# Altium PCB PCB_Fusion.PcbDoc
Units mm, origin at the board's own origin, x right, y up, seen from the top; angles counter-clockwise.
Board outline 25.02 x 45.09 mm, 2 copper layers (Top Layer, Bottom Layer); 50 components, 37 nets, 188 pads, 56 vias.
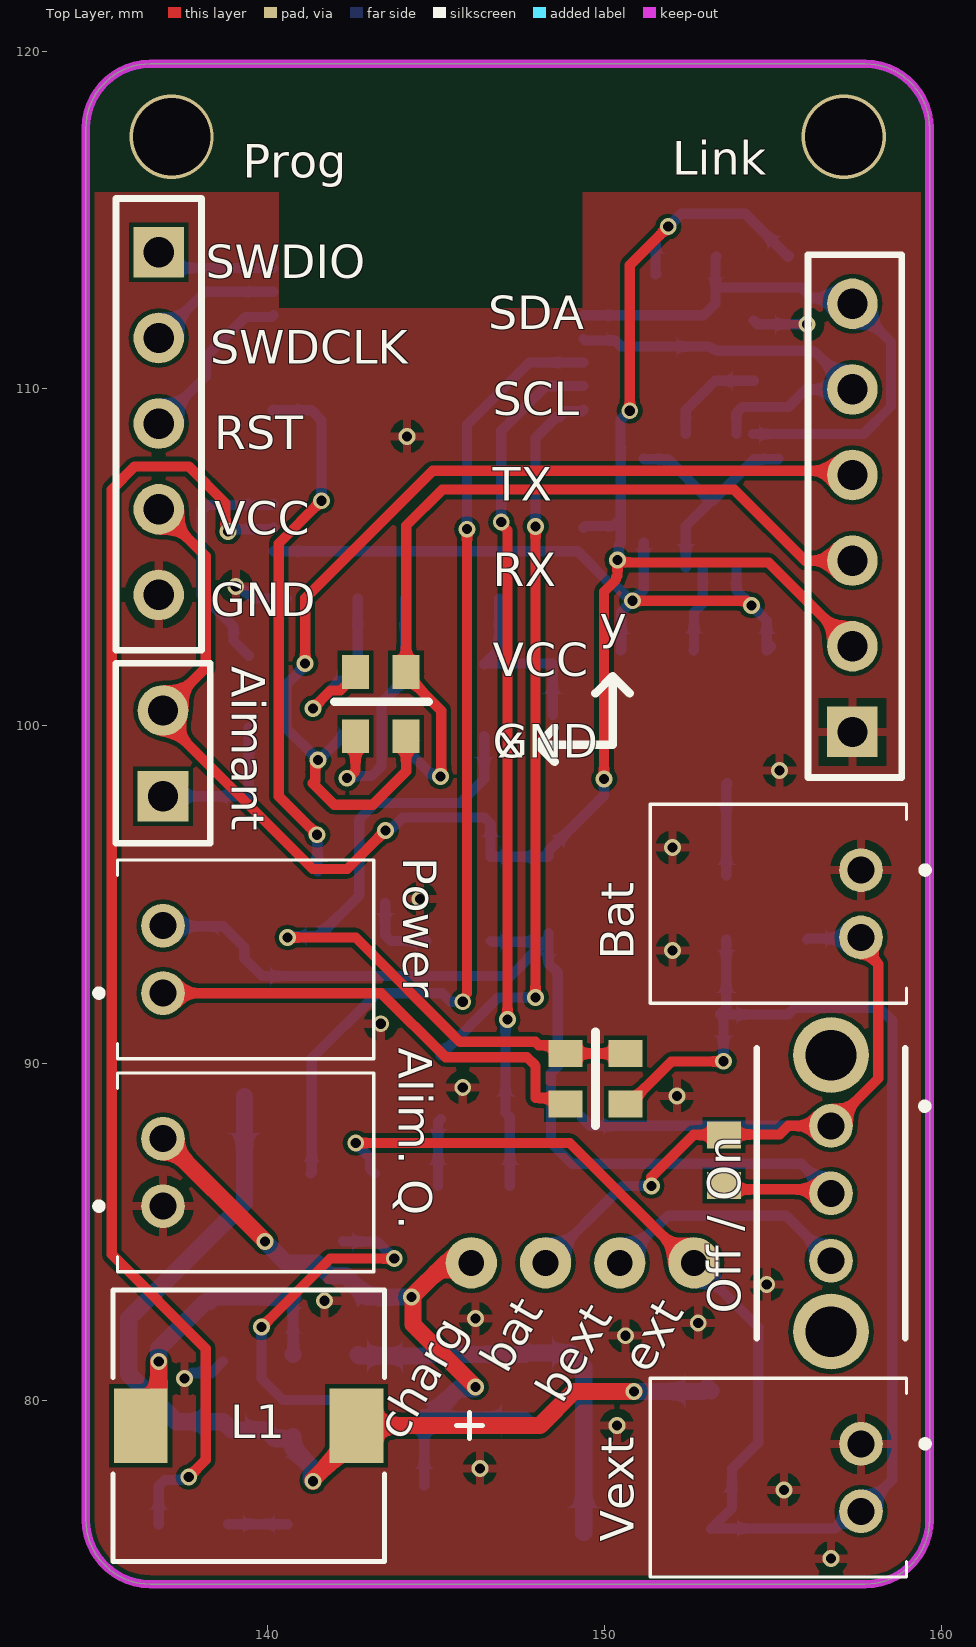
[diagram p0: Top Layer view]
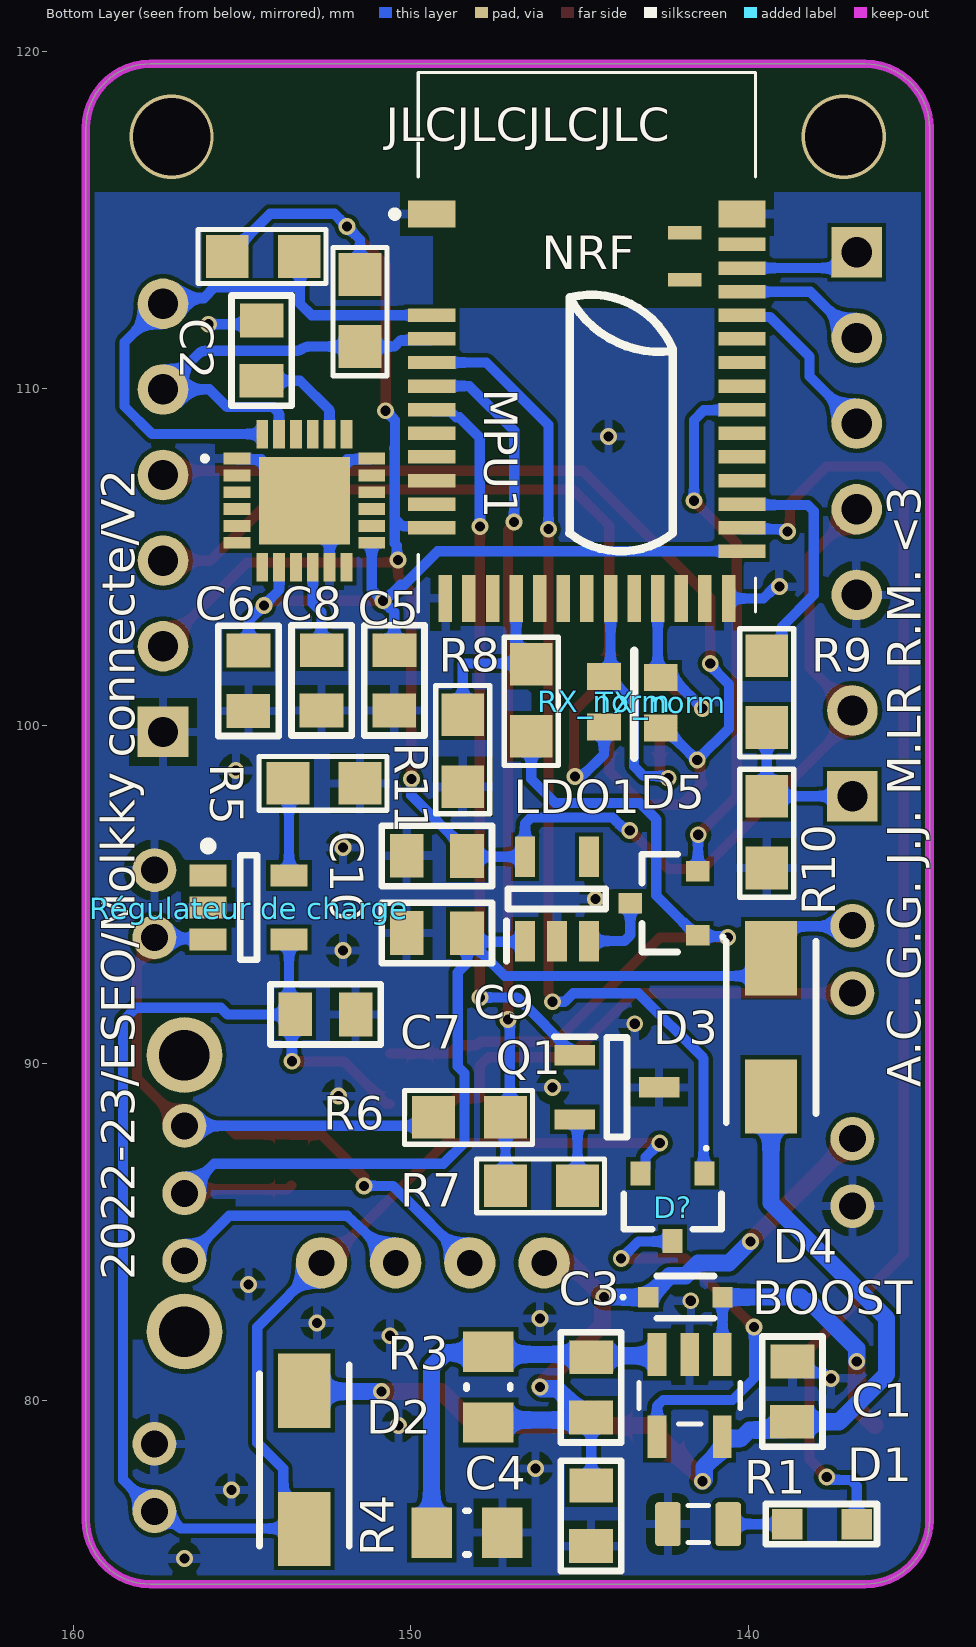
[diagram p1: Bottom Layer view, seen from below]
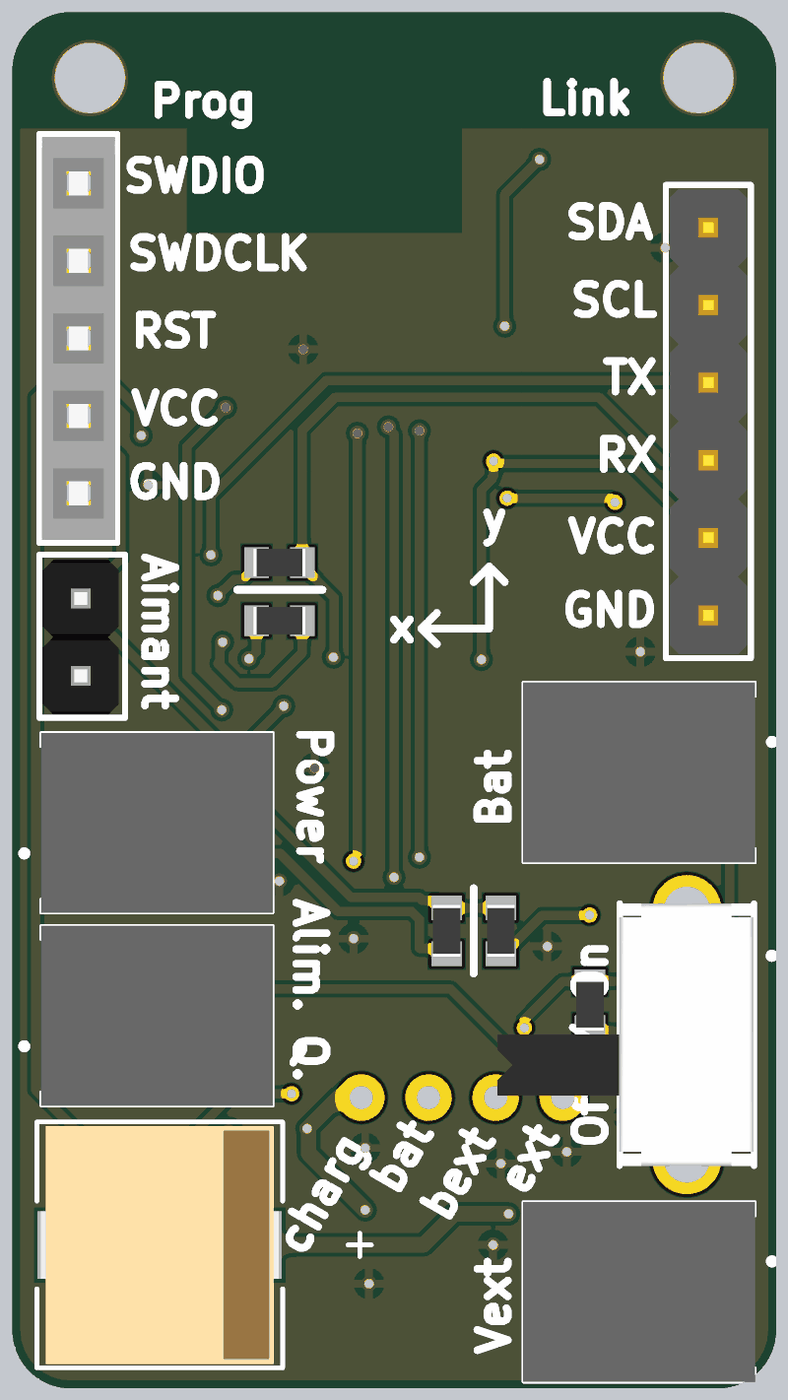
[diagram p2: 3D render of the assembled board from above, using the file's embedded part models]
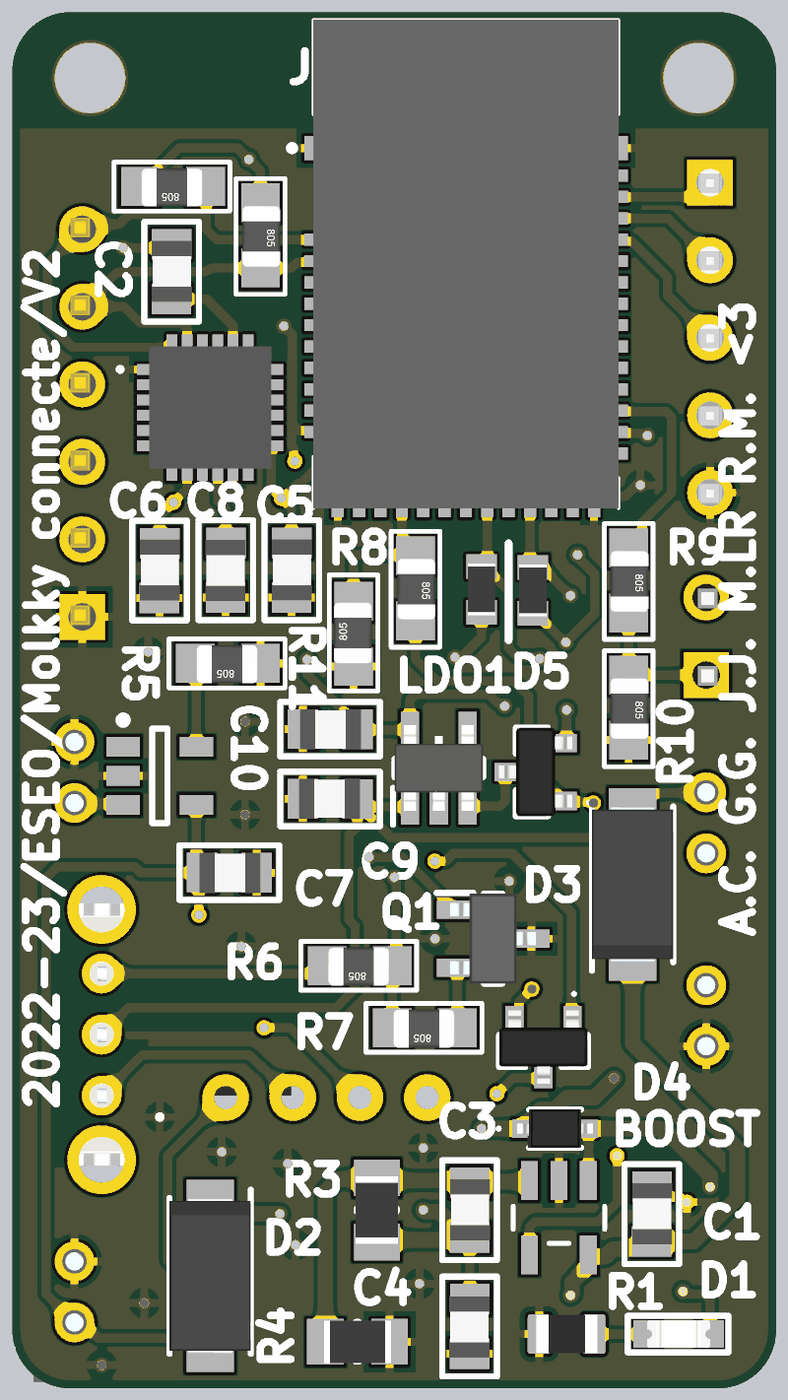
[diagram p3: 3D render of the assembled board from below, using the file's embedded part models]

## Layer stack, top to bottom
Top Solder: solder mask 0.0102, Solder Resist, Dk 3.5
Top Layer: signal copper 0.0356
Dielectric 1: dielectric 0.32, FR-4, Dk 4.8
Bottom Layer: signal copper 0.0356
Bottom Solder: solder mask 0.0102, Solder Resist, Dk 3.5

## Board outline
134.62,76.454 134.62,117.729 cw(c136.525,117.729) 136.525,119.634 157.734,119.634 cw(c157.734,117.729) 159.639,117.729 159.639,76.454 cw(c157.734,76.454) 157.734,74.549 136.525,74.549 cw(c136.525,76.454)

## Design rules (kind name [scope] priority, off if disabled: settings)
Clearance [All] p1: gap=0.127 ignorepadtopadclearanceinfootprint=FALSE except(0.254: Arc-Via Track-Via Via-Via; 0.508: THPad-THPad)
PolygonConnect [All] p1: connectstyle=Relief reliefconductorwidth=0.254 reliefentries=4 polygonreliefangle="90 Angle" airgapwidth=0.254
RoutingVias [All] p1: holewidth=0.3 width=0.5 viastyle="Through Hole" minholewidth=0.762 minwidth=0.381 maxholewidth=1.016 maxwidth=0.762
SMDNeckDown [All] p1: percent=50.000
SolderMaskExpansion [All] p1: expansion=0.102 istentingtop=FALSE
Width [All] p1: maxlimit=0.508 minlimit=0.127 preferedwidth=0.305
30 further rules are at their usual default settings.

## Classes and differential pairs
component class Fusion: BOOST C1 C2 C3 C4 C5 C6 C7 C8 C9 C10 D1 D2 D3 D4 D5 L1 LDO1 Link MPU1 NRF Prog Q1 R1 R3 R4 R5 R6 R7 R8 R9 R10 R11

## Components (designator, comment, footprint, x,y, rotation, side; value= is the part's Value field where it differs from the comment)
Aimant "JUMPER2" BARRETTE_2_M_D 136.906,97.917 r90 top (schematic designator "Switch magnetique1")
"Alim. Q." "S2B-PH-K-S" S2BPHKS 136.906,85.757 r270 top (schematic designator Connecteur_Alim_Quille1)
Bat "S2B-PH-K-S" S2BPHKS 157.607,95.726 r90 top (schematic designator "Connecteur Bat")
BOOST "LM2735XMF" SOT95P285X110-5N 141.732,80.137 r270 bottom
C1 "CONDENSATEUR_CMS_CER_0805" CONDENSATEUR_CMS_0805 138.694,79.363 r90 bottom value=10uF
C2 "CONDENSATEUR_CMS_CER_0805" CONDENSATEUR_CMS_0805 154.432,110.236 r90 bottom value=2.2nF
C3 "CONDENSATEUR_CMS_CER_0805" CONDENSATEUR_CMS_0805 144.663,79.49 r90 bottom value=330pF
C4 "CONDENSATEUR_CMS_CER_0805" CONDENSATEUR_CMS_0805 144.653,77.47 r270 bottom value=10uF
C5 "CONDENSATEUR_CMS_CER_0805" CONDENSATEUR_CMS_0805 150.495,100.457 r90 bottom value=100nF
C6 "CONDENSATEUR_CMS_CER_0805" CONDENSATEUR_CMS_0805 154.823,100.445 r90 bottom value=10nF
C7 "CONDENSATEUR_CMS_CER_0805" CONDENSATEUR_CMS_0805 153.428,91.45 r180 bottom value=4.7uF
C8 "CONDENSATEUR_CMS_CER_0805" CONDENSATEUR_CMS_0805 152.644,102.247 r270 bottom value=100nF
C9 "CONDENSATEUR_CMS_CER_0805" CONDENSATEUR_CMS_0805 148.336,93.853 r0 bottom value=1uF
C10 "CONDENSATEUR_CMS_CER_0805" CONDENSATEUR_CMS_0805 150.126,96.149 r180 bottom value=4.7uF
D1 "LED_CMS_0805" LED_CMS_0805 136.779,76.327 r270 bottom
D2 "ES1D-E3_61T" DIOM5127X229N 153.162,78.232 r270 bottom
D3 "ES1D-E3_61T" DIOM5127X229N 139.319,91.059 r90 bottom
D4 "BAT165AX" BAT165AX 141.859,83.058 r180 bottom
D5 "BAT54C,215" BAT54C215 142.494,94.742 r90 bottom
D? "BAT54C,215" BAT54C215 142.24,85.725 r0 bottom
L1 "1234659" IND_123_4659_RSP 139.446,79.248 r180 top
LDO1 "TPS76333DBVT" SOT95P280X145-5N 145.669,94.869 r90 bottom
Link "BARRETTE_6 CONTACTS_1 RANGEE_MALE_DROITE" BARRETTE_6_M_D 157.353,99.822 r90 top (schematic designator "Connecteur link")
MPU1 "MPU-6050" MPU6050 153.162,106.68 r180 bottom
NRF "MDBT42Q-512KV2" MDBT42Q512KV2 144.78,111.379 r180 bottom
"Off / On" "OS102011MA1QN1" OS102011MA1QN1 156.718,86.138 r270 top (schematic designator "Interrupteur glissière?")
Power "S2B-PH-K-S" S2BPHKS 136.906,92.075 r270 top (schematic designator "Interrupteur Power")
"Power btn" "Resistor 4k7 +/-1% 0603 100 mW" RESC1608X55X25ML10T15 148.844,89.535 r90 top value=0
"Power Vext" "Resistor 4k7 +/-1% 0603 100 mW" RESC1608X55X25ML10T15 150.622,89.535 r90 top value=0
Prog "BARRETTE_5 CONTACTS_1 RANGEE_FEMELLE_DROITE" BARRETTE_5_F_D 136.779,114.046 r270 top (schematic designator "Connecteur prog1")
"PULLUP SCL1" "RESISTANCE_CMS_0805" RESISTANCE_CMS_0805 151.511,113.386 r270 bottom value=10k
"PULLUP SDA1" "RESISTANCE_CMS_0805" RESISTANCE_CMS_0805 153.314,113.919 r0 bottom value=10k
Q1 "TSM2312CX_RFG" SOT95P280X130-3N 143.891,89.281 r180 bottom
R1 "Resistor 1K +/-5% 0805 125 mW" RESC0805(2012)_L 141.478,76.327 r180 bottom value=150
R2 "Resistor 4k7 +/-1% 0603 100 mW" RESC1608X55X25ML10T15 153.543,87.122 r270 top value=0
R3 "Resistor 10k +/-1% 0805 125 mW" RESC2013X50X35ML15T15 147.701,80.391 r270 bottom value=33k
R4 "Resistor 10k +/-1% 0805 125 mW" RESC2013X50X35ML15T15 148.336,76.073 r0 bottom value=100k
R5 "RESISTANCE_CMS_0805" RESISTANCE_CMS_0805 151.511,98.298 r0 bottom value=10k
R6 "RESISTANCE_CMS_0805" RESISTANCE_CMS_0805 147.193,88.392 r0 bottom value=100k
R7 "RESISTANCE_CMS_0805" RESISTANCE_CMS_0805 145.059,86.36 r0 bottom value=100k
R8 "RESISTANCE_CMS_0805" RESISTANCE_CMS_0805 146.431,101.829 r270 bottom value=100k
R9 "RESISTANCE_CMS_0805" RESISTANCE_CMS_0805 139.446,102.083 r270 bottom value=100
R10 "RESISTANCE_CMS_0805" RESISTANCE_CMS_0805 139.446,97.917 r270 bottom value=10k
R11 "RESISTANCE_CMS_0805" RESISTANCE_CMS_0805 148.463,98.196 r90 bottom value=100k
RX_inv "Resistor 4k7 +/-1% 0603 100 mW" RESC1608X55X25ML10T15 143.367,99.695 r0 top value=0
RX_norm "Resistor 4k7 +/-1% 0603 100 mW" RESC1608X55X25ML10T15 144.272,100.723 r90 bottom value=0
"Régulateur de charge" "MCP73831T-2DCI/OT" SOT-23-OT5_N 154.813,94.615 r180 bottom
TX_inv "Resistor 4k7 +/-1% 0603 100 mW" RESC1608X55X25ML10T15 143.367,101.6 r0 top value=0
TX_norm "Resistor 4k7 +/-1% 0603 100 mW" RESC1608X55X25ML10T15 142.587,100.689 r90 bottom value=0
Vext "S2B-PH-K-S" S2BPHKS 157.607,78.708 r90 top (schematic designator "Connecteur Vext")

## Footprints (in the part's own frame and the unit in brackets; to place one, negate y for a bottom-side part, rotate by r counter-clockwise, add the part's x,y. Pads: shape width x height; smd on the part's side, far side on the other; paste and mask are expansions set on the pad)
BARRETTE_2_M_D [mm] "BARRETTE 2 CONTACTS ; 1 RANGEE ; DROITE ; MALE ; ESPACEMENT BROCHES = 2.54 mm"
  rect 1.5x1.5 hole 0.9: 1(0,0)
  round 1.5 hole 0.9: 2(2.54,0)
  silkscreen extent -1.4,-1.4 3.94,1.4, body extent -1.3,-1.2 3.78,1.3, height 8.55
BARRETTE_5_F_D [mm] "BARRETTE 5 CONTACTS ; 1 RANGEE ; DROITE ; FEMELLE ; ESPACEMENT BROCHES = 2.54 mm"
  rect 1.5x1.5 hole 0.9: 1(0,0)
  round 1.5 hole 0.9: 2(2.54,0) 3(5.08,0) 4(7.62,0) 5(10.16,0)
  silkscreen extent -1.6,-1.27 11.8,1.27, body extent -1.5,-1.2 11.7,1.21, height 8.5
BARRETTE_6_M_D [mm] "BARRETTE 6 CONTACTS ; 1 RANGEE ; DROITE ; MALE ; ESPACEMENT BROCHES = 2.54 mm"
  rect 1.5x1.5 hole 0.9: 1(0,0)
  round 1.5 hole 0.9: 2(2.54,0) 3(5.08,0) 4(7.62,0) 5(10.16,0) 6(12.7,0)
  silkscreen extent -1.35,-1.46 14.15,1.32, body extent -1.22,-1.34 14.02,1.2, height 10.1
BAT54C215 [mm]
  rect 0.6x0.7 smd: 1(-0.95,-1) 2(0.95,-1) 3(0,1)
  silkscreen extent -1.45,-1.8 1.45,0.65, body extent -1.45,-1.2 1.45,1.2, height 0.95
BAT165AX [mm]
  rect 0.6x0.6 smd: 1(-1.1,0) 2(1.1,0)
  silkscreen extent -1.9,-0.62 0.85,0.62, body extent -1.24,-0.62 1.24,0.63, height 0.93
CONDENSATEUR_CMS_0805 [mm] "CONDENSATEUR CMS 0805 ; DIMENSIONS : 2mm x 1.25mm"
  rect 1x1.3 smd: 1(0,0) 2(1.79,-0.01)
  silkscreen extent -0.74,-0.9 2.53,0.89, body extent -0.09,-0.67 1.91,0.64, height 0.73
DIOM5127X229N [mm]
  rect 2.2x1.55 smd: 1(-2.05,0) 2(2.05,0)
  silkscreen extent -2.82,-1.33 2.55,1.33, body extent -2.55,-1.33 2.55,1.33, height 2.29
IND_123_4659_RSP [mil]
  rect 63x87 smd paste+0 mask+0: 1(-126,0) 2(126,0)
  silkscreen extent -273,-159 159,159, body extent -154,-154 154,154, height 199
LED_CMS_0805 [mm] "LED CMS 0805 ; DIMENSIONS : 2.0mm x 0.9mm"
  rect 0.9x0.9 smd: 1(0,0) 2(0,-2.062)
  silkscreen extent -0.6,-2.7 0.6,0.6, body extent -0.45,-2.06 0.45,0, height 0.85
MDBT42Q512KV2 [mm]
  rect 1.4x0.8 smd: 1(-4.6,3.8) 39(4.6,3.8)
  rect 1.4x0.4 smd: 2(-4.6,0.8) 3(-4.6,0.1) 4(-4.6,-0.6) 5(-4.6,-1.3) 6(-4.6,-2) 7(-4.6,-2.7) 8(-4.6,-3.4) 9(-4.6,-4.1) 10(-4.6,-4.8) 11(-4.6,-5.5) 25(4.6,-6.2) 26(4.6,-5.5) 27(4.6,-4.8) 28(4.6,-4.1) 29(4.6,-3.4) 30(4.6,-2.7) 31(4.6,-2) 32(4.6,-1.3) 33(4.6,-0.6) 34(4.6,0.1) 35(4.6,0.8) 36(4.6,1.5) 37(4.6,2.2) 38(4.6,2.9)
  rect 0.4x1.4 smd: 12(-4.2,-7.6) 13(-3.5,-7.6) 14(-2.8,-7.6) 15(-2.1,-7.6) 16(-1.4,-7.6) 17(-0.7,-7.6) 18(0,-7.6) 19(0.7,-7.6) 20(1.4,-7.6) 21(2.1,-7.6) 22(2.8,-7.6) 23(3.5,-7.6) 24(4.2,-7.6)
  rect 1x0.4 smd: 40(2.9,3.25) 41(2.9,1.85)
  silkscreen extent -5.8,-8 5,8, body extent -5,-8 5,8, height 2.3
MPU6050 [mm]
  rect 0.8x0.35 smd: 1(-2,1.25) 2(-2,0.75) 3(-2,0.25) 4(-2,-0.25) 5(-2,-0.75) 6(-2,-1.25) 13(2,-1.25) 14(2,-0.75) 15(2,-0.25) 16(2,0.25) 17(2,0.75) 18(2,1.25)
  rect 0.35x0.85 smd: 7(-1.25,-1.975) 8(-0.75,-1.975) 9(-0.25,-1.975) 10(0.25,-1.975) 11(0.75,-1.975) 12(1.25,-1.975) 19(1.25,1.975) 20(0.75,1.975) 21(0.25,1.975) 22(-0.25,1.975) 23(-0.75,1.975) 24(-1.25,1.975)
  rect 2.7x2.6 smd: 25(0,0)
  silkscreen extent -3,1.2 -2.9,1.3, body extent -2,-2 2,2, height 0.88
OS102011MA1QN1 [mm]
  round 1.3 hole 0.8: 1(-2,0) 2(0,0) 3(2,0)
  round 2.25 hole 1.5: 4(-4.1,0) 5(4.1,0)
  silkscreen extent -4.3,-2.2 4.3,2.88, body extent -4.3,-6.22 4.3,2.18, height 4.59
RESC0805(2012)_L [mm] "Chip Resistor, Body 2.0x1.3mm, IPC High Density"
  rrect25% 0.76x1.3 smd: 1(-0.9,0) 2(0.89,0)
  silkscreen extent -0.3,-0.55 0.3,0.55, body extent -1,-0.62 1,0.63, height 0.6
RESC1608X55X25ML10T15 [mm] "Chip Resistor, 2-Leads, Body 1.70x0.90mm, IPC Low Density"
  rect 0.8x1 smd: 1(-0.75,0) 2(0.75,0)
  body extent -0.85,-0.45 0.85,0.45, height 0.55
RESC2013X50X35ML15T15 [mm] "Chip Resistor, 2-Leads, Body 2.2x1.4mm, IPC Low Density"
  rect 1.2x1.5 smd: 1(-1.05,0) 2(1.05,0)
  silkscreen extent -0.05,-0.65 0.05,0.65, body extent -1.1,-0.7 1.1,0.7, height 0.5
RESISTANCE_CMS_0805 [mil] "RESISTANCE CMS 0805 ; DIMENSIONS : 2mm x 1.25mm"
  rect 50x50 smd: 1(0,0) 2(84,0)
  silkscreen extent -31,-31 118,31, body extent 4,-24 83,26, height 31
S2BPHKS [mm]
  round 1.3 hole 0.8: 1(0,0) 2(-2,0)
  silkscreen extent -3.95,-2 1.95,6.25, body extent -3.95,-1.35 1.95,6.25, height 4.9
SOT95P280X130-3N [mm]
  rect 1.2x0.6 smd: 1(-1.25,0.95) 2(-1.25,-0.95) 3(1.25,0)
  silkscreen extent -1.85,-1.47 0.3,1.5, body extent -1.4,-1.47 1.4,1.47, height 1.3
SOT95P280X145-5N [mm]
  rect 1.2x0.6 smd: 1(-1.25,0.95) 2(-1.25,0) 3(-1.25,-0.95) 4(1.25,-0.95) 5(1.25,0.95)
  silkscreen extent -1.85,-1.45 0.3,1.5, body extent -1.4,-1.45 1.4,1.45, height 1.2
SOT95P285X110-5N [mil]
  rect 50x22 smd: 1(-48,38) 2(-48,0) 3(-48,-38) 4(48,-38) 5(48,38)
  silkscreen extent -15,-59 33,59
SOT-23-OT5_N [mm] "SOT23, 5-Leads, Body 2.9x1.6mm, Pitch 0.95mm, Lead Span 2.7mm, IPC Medium Density"
  rect 1.1x0.65 smd: 1(-1.2,0.95) 2(-1.2,0) 3(-1.2,-0.95) 4(1.2,-0.95) 5(1.2,0.95)
  silkscreen extent -1.33,-1.55 0.25,1.95, body extent -0.9,-1.55 0.9,1.55, height 1.45

## Part data
Aimant: library part CMP-039-0004-1, "BARRETTE 2 CONTACTS 1 RANGEE MALE DROITE", Design Item ID=JUMPER2, Source=connecteurs.SchLib, Type=JUMPER2
"Alim. Q." Bat Power Vext: "Connector", Manufacturer_Name="JST (JAPAN SOLDERLESS TERMINALS)", Datasheet Link=https://media.digikey.com/pdf/Data%20Sheets/JST%20PDFs/PH%20Series.pdf, Height=4.8mm, Manufacturer_Part_Number=S2B-PH-K-S
BOOST: "Integrated Circuit", Manufacturer_Name="Texas Instruments", Manufacturer_Part_Number=LM2735XMF
C1 C2 C3 C4 C5 C6 C7 C8 C9 C10: library part CMP-038-0003-1, "CONDENSATEUR CMS CERAMIQUE 0805", Design Item ID=CONDENSATEUR_CMS_CER_0805, Source="composants passifs.SchLib", Type=CMS_0805
D1: library part CMP-024-0003-1, "LED CMS 0805", Design Item ID=LED_CMS_0805, Source=affichage.SchLib, Type=CMS_0805
D2 D3: "Diode", Arrow Part Number=ES1D-E3/61T, Manufacturer_Name=Vishay, Mouser Part Number=625-ES1D-E3, Arrow Price/Stock=https://www.arrow.com/en/products/es1d-e361t/vishay, Datasheet Link=https://componentsearchengine.com/Datasheets/2/ES1D-E3_61T.pdf, Height=2.29mm, Manufacturer_Part_Number=ES1D-E3/61T, Mouser Price/Stock=https://www.mouser.co.uk/ProductDetail/Vishay-General-Semiconductor/ES1D-E3-61T?qs=rfh7uIuiIO0XwaKoN5aNdQ%3D%3D
D4: "Schottky Diode", Manufacturer_Name=Nexperia, Mouser Part Number=771-BAT165AX, Arrow Part Number=BAT165AX, Arrow Price/Stock=https://www.arrow.com/en/products/bat165ax/nexperia?region=nac, Datasheet Link=https://assets.nexperia.com/documents/data-sheet/BAT165A.pdf, Height=1.1mm, Manufacturer_Part_Number=BAT165AX, Mouser Price/Stock=https://www.mouser.co.uk/ProductDetail/Nexperia/BAT165AX?qs=1fQ7IOp4WriMQ9TlJoQ5jw%3D%3D
D5 D?: "Schottky Diode", Manufacturer_Name=Nexperia, Mouser Part Number=771-BAT54C-T/R, Arrow Part Number=BAT54C,215, Arrow Price/Stock=https://www.arrow.com/en/products/bat54c215/nexperia?region=nac, Datasheet Link=https://assets.nexperia.com/documents/data-sheet/BAT54_SER.pdf, Height=1.1mm, Manufacturer_Part_Number=BAT54C,215, Mouser Price/Stock=https://www.mouser.co.uk/ProductDetail/Nexperia/BAT54C215?qs=me8TqzrmIYV5SKKt13YKQA%3D%3D
L1: "No Description Available", Mfr_Name="RS Pro", Copyright="Copyright (C) 2022 Ultra Librarian. All rights reserved.", Manufacturer_Part_Number=1234659, RefDes=RefDes, Type=DEV
LDO1: "Integrated Circuit", Manufacturer_Name="Texas Instruments", Mouser Part Number=595-TPS76333DBVT, Arrow Part Number=TPS76333DBVT, Arrow Price/Stock=https://www.arrow.com/en/products/tps76333dbvt/texas-instruments?region=nac, Datasheet Link=https://datasheet.datasheetarchive.com/originals/distributors/Datasheets-36/DSA-717371.pdf, Height=1.45mm, Manufacturer_Part_Number=TPS76333DBVT, Mouser Price/Stock=https://www.mouser.co.uk/ProductDetail/Texas-Instruments/TPS76333DBVT?qs=tJ5HNKWh3OU6kt%2FvF%2F5hDQ%3D%3D
Link: library part CMP-039-0125-1, "BARRETTE 6 CONTACTS 1 RANGEE MALE DROITE", Design Item ID="BARRETTE_6 CONTACTS_1 RANGEE_MALE_DROITE", Source=connecteurs.SchLib, Type=M_D_6
MPU1: "Integrated Circuit", Manufacturer_Name=TDK, Mouser Part Number=410-MPU-6050, Arrow Part Number=MPU-6050, Arrow Price/Stock=https://www.arrow.com/en/products/mpu-6050/invensense?region=nac, Datasheet Link=https://product.tdk.com/system/files/dam/doc/product/sensor/mortion-inertial/imu/data_sheet/mpu-6000-datasheet1.pdf, Height=0.95mm, Manufacturer_Part_Number=MPU-6050, Mouser Price/Stock=https://www.mouser.co.uk/ProductDetail/TDK-InvenSense/MPU-6050?qs=u4fy%2FsgLU9O14B5JgyQFvg%3D%3D
NRF: "Integrated Circuit", Manufacturer_Name=Raytac, Datasheet Link=http://www.raytac.com/download/index.php?index_id=27, Height=2.2mm, Manufacturer_Part_Number=MDBT42Q-512KV2
"Off / On": "Switch", Manufacturer_Name="C & K COMPONENTS", Mouser Part Number=611-OS102011MA1QN1, Arrow Part Number=OS102011MA1QN1, Arrow Price/Stock=https://www.arrow.com/en/products/os102011ma1qn1/ck?region=europe, Datasheet Link=http://www.ckswitches.com/media/1428/os.pdf, Manufacturer_Part_Number=OS102011MA1QN1, Mouser Price/Stock=https://www.mouser.co.uk/ProductDetail/CK/OS102011MA1QN1?qs=WtljUlYws5R6MUgHcLkz4w%3D%3D
"Power btn" "Power Vext" R2 RX_inv RX_norm TX_inv TX_norm: library part CMP-009-00031-5, "Chip Resistor, 4.7 KOhm, +/- 1%, 0.1 W, -55 to 155 degC, 0603 (1608 Metric)", Case/Package=0603, Max Operating Temperature=155°C, Min Operating Temperature=-55°C, Power=100mW, Tolerance=1%, Mounting Technology=SM, Pins=2, RoHS Compliant=True
Prog: library part CMP-039-0118-1, "BARRETTE 5 CONTACTS 1 RANGEE FEMELLE DROITE", Design Item ID="BARRETTE_5 CONTACTS_1 RANGEE_FEMELLE_DROITE", Source=connecteurs.SchLib, Type=F_D_5
"PULLUP SCL1" "PULLUP SDA1" R5 R6 R7 R8 R9 R10 R11: library part CMP-037-0001-1, "RESISTANCE CMS 0805", Design Item ID=RESISTANCE_CMS_0805, Source="composants passifs.SchLib", Type=CMS_0805
Q1: "MOSFET (N-Channel)", Arrow Part Number="TSM2312CX RFG", Manufacturer_Name="Taiwan Semiconductor", Mouser Part Number=821-TSM2312CXRFG, Arrow Price/Stock=https://www.arrow.com/en/products/tsm2312cxrfg/taiwan-semiconductor?region=asia, Datasheet Link=https://datasheet.datasheetarchive.com/originals/distributors/DKDS-20/389616.pdf, Height=1.3mm, Manufacturer_Part_Number="TSM2312CX RFG", Mouser Price/Stock=https://www.mouser.co.uk/ProductDetail/Taiwan-Semiconductor/TSM2312CX-RFG?qs=QEzMiVqgwc0lDLiJAqaF%252Bw%3D%3D
R1: library part CMP-009-00118-3, "Chip Resistor, 1 kOhms, +/-5%, 125 mW, -55 to 155 degC, 0805", Case/Package=0805, Max Operating Temperature=155°C, Min Operating Temperature=-55°C, Power=125mW, Tolerance=5%, Pins=2
R3 R4: library part CMP-009-00018-5, "Chip Resistor, 10 KOhm, +/- 1%, 125 mW, -55 to 155 degC, 0805 (2012 Metric)", Case/Package=0805, Max Operating Temperature=155°C, Min Operating Temperature=-55°C, Power=125mW, Tolerance=1%, Voltage Rating=150V, Mounting Technology=SM, Pins=2, RoHS Compliant=True
"Régulateur de charge": library part CMP-045-0000-1, "Miniature Single-Cell, Fully Integrated Li-Ion, Li-Polymer Charge Management Controller, 4.2V, 5-Pin SOT-23, Industrial Temperature, Tape and Reel", Manufacturer=Microchip, Code_IPC=SOT23-5, ComponentLink1Description="Manufacturer URL", ComponentLink1URL=http://www.microchip.com/, ComponentLink2Description=Datasheet, ComponentLink2URL=http://ww1.microchip.com/downloads/en/DeviceDoc/21984e.pdf, ComponentLink3Description="Package Specification", ComponentLink3URL=http://www.microchip.com/stellent/groups/techpub_sg/documents/packagingspec/en012702.pdf, DatasheetVersion="revE, Sep-2008", Design Item ID=MCP73831T-2DCI/OT, Mounting Technology="Surface Mount", PackageDescription="5-Lead Plastic Small Outline Transistor (OT) [SOT-23]", PackageReference=SOT-23-OT5, PackageVersion="revBB, Aug-2009", PartNumber=MCP73831T-2DCI/OT, Source=energie.SchLib

## Free pads (board coordinates)
  round 1.524 hole 0.762: 2(150.453,84.074) 3(148.251,84.074) 5(146.05,84.074) 6(152.654,84.074)

## Via types
v1: diameter 0.5, hole 0.3, Top Layer to Bottom Layer, tented both sides, 43 vias
v2: diameter 0.5, hole 0.3, Top Layer to Bottom Layer, 11 vias
v3: diameter 2.5, hole 2.3, Top Layer to Bottom Layer, 2 vias

## Nets (pads, with @x,y where several pads share a name; then routed paths per layer and width w, separated by ;. In a path a pad name is that pad's centre, name@x,y a point inside that pad or via, vN(x,y) a via of type N, cw(c..) or ccw(c..) an arc to the next point about the centre after c; other vN are vias at no path point)
Aimant: NRF.27 R9.1 | length 7.1
  Bottom Layer w0.305: R9.1 138.996,102.533 138.996,102.939 138.049,103.886 138.049,106.374 138.228,106.553 140.154,106.553 NRF.27
"EN lecture bat": NRF.6 Q1.1 | length 21.9
  Top Layer w0.305: v1(147.955,91.948) v1(147.955,105.918)
  Bottom Layer w0.305: Q1.1 145.141,90.238 146.851,91.948 v1(147.955,91.948) ; v1(147.955,105.918) 147.955,108.549 148.564,109.158 148.659,109.158 148.832,109.331 149.332,109.331 NRF.6
EN_Alim_quilles: D?.1 NRF.4 | length 29.9
  Top Layer w0.305: 145.923,92.075 v1(145.923,105.835)
  Bottom Layer w0.305: D?.1 141.32,86.756 141.32,90.139 143.256,92.075 145.189,92.075 145.443,91.821 v2(145.796,91.821) ; v1(145.923,105.835) 145.923,108.937 147.765,110.779 NRF.4
GND: "Alim. Q..1" "Régulateur de charge.2" Bat.1 BOOST.2 C1.2 C2.2 C4.2 C5.1 C6.1 C7.2 C8.2 C9.2 C10.1 LDO1.2 Link.1 MPU1.1 MPU1.11 MPU1.18 MPU1.25 NRF.1 NRF.12 NRF.24 NRF.39 Prog.5 Q1.3 R1.1 R4.1 R5.1 R10.2 R11.1 Vext.1 | length 12
  Bottom Layer w0.305: v2(137.541,80.645) 137.594,80.645 137.754,80.805 138.336,80.805 C1.2 ; v1(139.065,104.14) 139.189,104.14 139.55,103.779 NRF.24 ; MPU1.18 151.185,107.907 151.885,107.907 153.112,106.68 MPU1.25 ; MPU1.11 152.412,105.93 MPU1.25 ; C2.2 154.536,111.912 v1(156.009,111.912) ; MPU1.1 155.139,107.907 154.439,107.907 153.212,106.68 MPU1.25
  other v1: 156.718,75.311 155.321,77.343 146.304,77.978 150.368,79.248 150.622,81.915 152.781,82.296 146.177,82.423 141.7,82.952 154.813,83.439 152.146,89.027 145.796,89.281 143.363,91.166 152.019,93.345 144.526,94.869 152.019,96.393 155.194,98.679 144.145,108.585
"Lecture Vbat": NRF.5 R6.1 R7.2 | length 25.5
  Top Layer w0.305: v1(146.939,106.045) 146.939,105.992 147.123,105.808 v1(147.123,91.292)
  Bottom Layer w0.305: v1(146.939,106.045) 146.939,108.754 148.264,110.079 NRF.5 ; v1(147.123,91.292) 147.08,91.248 147.08,91.073 147.066,91.059 147.066,88.519 R6.1 R7.2
LED: D1.1 NRF.26 | length 39.2
  Top Layer w0.305: v1(137.668,77.724) 138.176,78.232 138.176,81.534 135.382,84.328 135.382,107.009 136.069,107.696 137.668,107.696 138.76,106.604 138.76,105.842 v1(138.836,105.766)
  Bottom Layer w0.305: D1.1 136.779,77.458 136.958,77.637 137.581,77.637 v1(137.668,77.724) ; v1(138.836,105.766) 138.902,105.831 140.132,105.831 NRF.26
NetBOOST_1: BOOST.1 D4.2 L1.2 | length 8.8
  Top Layer w0.508: L1.2 136.779,79.781 v1(136.779,81.147)
  Bottom Layer w0.305: BOOST.1@140.763,81.36 D4.2@140.763,83.054
  Bottom Layer w0.508: v1(136.779,81.147) 136.779,81.534 138.176,82.931 138.303,82.931 138.43,83.058 D4.2 D4.2@140.763,83.054 ; BOOST.1@140.763,81.36 BOOST.1
NetBOOST_3: BOOST.3 C3.2 R3.1 R4.2 | length 11.9
  Bottom Layer w0.508: BOOST.3 142.697,81.343 142.723,81.318 144.615,81.318 C3.2 144.733,81.36 147.621,81.36 R3.1 147.735,81.407 148.971,81.407 149.386,80.992 R4.2
NetBOOST_4: BOOST.4 D?.3 | length 12.2
  Top Layer w0.3: v2(139.827,82.169) 141.859,84.201 v2(143.764,84.201)
  Bottom Layer w0.3: v2(139.827,82.169) 139.827,80.645 140.462,80.01 142.521,80.01 142.697,79.834 BOOST.4 ; D?.3 142.256,84.709 143.256,84.709 v2(143.764,84.201)
NetBOOST_5: BOOST.5 C1.1 D2.1 D3.1 L1.1 | length 30.1
  Top Layer w0.508: v1(141.351,77.597) 141.351,77.648 142.646,78.943 L1.1 148.082,79.248 149.098,80.264 v1(150.876,80.264)
  Bottom Layer w0.508: D3.1 139.319,85.852 135.89,82.423 135.89,80.772 137.299,79.363 C1.1 138.94,79.117 139.958,79.117 140.208,78.867 140.741,78.867 BOOST.5@140.767,78.892 ; BOOST.5 BOOST.5@140.767,78.892 ; v1(141.351,77.597) 141.302,77.646 141.302,78.027 140.767,78.562 BOOST.5@140.767,78.892 ; v1(150.876,80.264) 152.926,80.264 153.053,80.391 D2.1
NetC2_1: C2.1 MPU1.20 | length 3.1
  Bottom Layer w0.305: MPU1.20 152.412,109.359 153.289,110.236 C2.1
NetC8_1: C8.1 MPU1.10 | length 2.6
  Bottom Layer w0.305: C8.1 152.654,102.257 152.654,103.378 152.912,103.636 MPU1.10
NetD1_2: D1.2 R1.2 | length 1.7
  Bottom Layer w0.305: D1.2 R1.2
NetD5_1: "Power btn.2" "Power Vext.2" D5.1 R8.2 | length 21.8
  Top Layer w0.305: v2(140.602,93.726) 142.621,93.726 145.712,90.635 147.951,90.635 148.054,90.533 148.596,90.533 148.844,90.285 150.622,90.285
  Bottom Layer w0.305: v2(140.602,93.726) 140.635,93.759 141.461,93.759 D5.1 141.544,93.792 142.723,94.971 142.723,97.227 143.209,97.714 145.72,97.714 146.431,98.425 R8.2
NetD5_3: D5.3 LDO1.3 | length 2.2
  Bottom Layer w0.305: D5.3 143.494,93.798 143.673,93.619 LDO1.3
"NetInterrupteur Power_1": "Power btn.1" Power.1 | length 13.9
  Top Layer w0.305: Power.1 143.383,92.075 145.288,90.17 147.701,90.17 147.955,89.916 147.955,88.964 148.665,88.964 148.844,88.785
NetQ1_2: Q1.2 R7.1 | length 2
  Bottom Layer w0.305: R7.1 145.059,88.249 Q1.2
NetR5_2: "Régulateur de charge.5" R5.2 | length 2.7
  Bottom Layer w0.305: 153.613,95.565 153.613,98.266 R5.2
NetR9_2: Aimant.1 R9.2 R10.1 | length 4.6
  Bottom Layer w0.305: Aimant.1 R10.1 R9.2
Power: NRF.15 R8.1 R11.2 | length 5.7
  Bottom Layer w0.305: R8.1 R8.1@146.456,101.854 ; NRF.15 146.88,102.278 R8.1@146.456,101.854 ; R11.2 148.463,101.854 R8.1@146.456,101.854
RESET: NRF.35 Prog.3 | length 5.1
  Bottom Layer w0.305: Prog.3 138.176,110.363 138.176,110.95 139.358,112.131 140.132,112.131 NRF.35
RX: NRF.19 RX_inv.1 RX_norm.2 | length 7.8
  Top Layer w0.305: v1(142.367,98.45) 142.392,98.45 142.617,98.675 RX_inv.1
  Bottom Layer w0.305: v1(142.367,98.45) 142.429,98.512 143.089,98.512 143.383,98.806 143.383,100.711 143.41,100.711 144.08,101.381 NRF.19
RX_out: Link.3 RX_norm.1 TX_inv.2 | length 24.4
  Top Layer w0.305: v1(145.136,98.501) 145.161,98.527 145.161,100.456 144.117,101.5 TX_inv.2 144.117,105.945 145.182,107.01 153.848,107.01 155.956,104.902 Link.3
  Bottom Layer w0.305: RX_norm.1 144.272,99.162 144.896,98.538 145.099,98.538 v1(145.136,98.501)
SCL: "PULLUP SCL1.2" Link.5 MPU1.23 NRF.3 | length 12.9
  Bottom Layer w0.305: NRF.3 149.428,111.431 150.316,111.431 150.495,111.252 151.511,111.252 153.028,111.252 cw(c153.028,110.947) 153.187,111.207 153.249,111.17 ccw(c153.407,111.43) 153.407,111.125 156.084,111.125 cw(c156.084,110.82) 156.299,111.036 Link.5 155.977,109.982 155.452,109.457 154.091,109.457 153.912,109.278 MPU1.23
SDA: "PULLUP SDA1.1" Link.6 MPU1.24 NRF.2 | length 17.7
  Bottom Layer w0.305: NRF.2 152.946,112.179 153.289,112.522 153.289,113.03 ; 153.314,113.919 153.289,113.894 153.289,113.03 ; MPU1.24 157.677,108.655 158.496,109.474 158.496,111.379 Link.6 157.187,112.688 156.146,112.688 155.829,113.005 153.314,113.005 153.289,113.03
Shutdown: D5.2 NRF.31 | length 16
  Top Layer w0.305: v1(141.478,96.774) 140.335,97.917 140.335,105.41 v1(141.605,106.68)
  Bottom Layer w0.305: NRF.31@140.164,109.363 NRF.31 140.196,109.363 141.312,109.363 141.605,109.07 v1(141.605,106.68) ; v1(141.478,96.774) 141.486,96.766 141.486,95.7 D5.2
SWDCLK: NRF.36 Prog.2 | length 4
  Bottom Layer w0.305: Prog.2 138.152,112.879 NRF.36
SWDIO: NRF.37 Prog.1 | length 3.6
  Bottom Layer w0.305: Prog.1 137.246,113.579 NRF.37
TX: NRF.21 TX_inv.1 TX_norm.2 | length 5.8
  Top Layer w0.305: v1(141.351,100.52) 141.883,101.052 142.169,101.052 142.617,101.5 TX_inv.1
  Bottom Layer w0.305: v1(141.351,100.52) 142.177,101.346 142.494,101.346 TX_norm.2 142.68,101.532 NRF.21
TX_out: Link.4 RX_inv.2 TX_norm.1 | length 30
  Top Layer w0.305: v1(141.122,101.854) 141.122,103.784 144.907,107.569 157.226,107.569 Link.4 ; v1(141.507,98.992) 141.42,98.904 141.42,98.367 141.351,98.298 141.986,97.663 143.129,97.663 144.117,98.651 RX_inv.2
  Bottom Layer w0.305: v1(141.122,101.854) 141.122,101.786 140.564,101.227 140.564,99.935 v1(141.507,98.992) 141.54,98.992 142.487,99.939 TX_norm.1
Vbat_Ext: "Off / On.3" pad.2 | length 7.4
  Bottom Layer w0.305: pad.2@150.368,84.074 151.892,85.471 155.385,85.471 156.718,84.138
Vbat_In: "Off / On.1" "Régulateur de charge.3" Bat.2 pad.3 R2.1 R6.2 | length 25.8
  Top Layer w0.3: v2(151.393,86.36) 151.386,86.367 151.386,86.616 151.638,86.868
  Top Layer w0.305: 151.638,86.868 152.642,87.872 R2.1 153.555,87.884 155.194,87.884 155.448,88.138 156.718,88.138 158.122,89.542 158.122,92.941 157.607,93.457 Bat.2
  Bottom Layer w0.3: pad.3 150.537,86.36 v2(151.393,86.36)
  Bottom Layer w0.305: R6.2 149.581,88.138 156.718,88.138 ; 156.013,93.665 156.044,93.695 157.576,93.695 Bat.2
Vbat_Out: "Off / On.2" C9.1 D3.2 LDO1.1 Power.2 R2.2 | length 32.8
  Top Layer w0.305: R2.2 153.66,86.255 156.601,86.255 156.718,86.138
  Bottom Layer w0.305: Power.2 136.924,94.057 138.696,94.057 139.319,93.434 D3.2 139.845,92.583 147.216,92.583 148.157,93.524 C9.1@148.336,93.703 ; LDO1.1 146.665,93.619 146.685,93.599 C9.1@148.082,93.599 ; C9.1 C9.1@148.336,93.703 ; 156.718,86.138 155.84,87.016 149.037,87.016 148.412,87.641 148.412,89.699 148.611,89.898 148.611,92.689 148.336,92.964 C9.1@148.336,93.703
VCC: "PULLUP SCL1.1" "PULLUP SDA1.2" Aimant.2 C10.2 LDO1.5 Link.2 NRF.11 Prog.4 | length 59.7
  Top Layer w0.305: Prog.4 138.176,105.029 138.176,101.727 Aimant.2 136.906,100.203 141.351,95.758 142.367,95.758 v1(143.51,96.901) ; v1(149.987,98.425) 149.987,103.986 150.342,104.342 150.342,104.414 150.385,104.456 v2(150.385,104.925) ; v2@150.305,104.845 154.87,104.845 Link.2 ; v1(150.749,109.347) 150.749,113.665 v1(151.892,114.808)
  Bottom Layer w0.305: v1(143.51,96.901) 143.597,96.988 143.724,96.988 144.018,97.282 146.44,97.282 146.619,97.103 LDO1.5 148.316,96.119 C10.2 148.336,96.289 149.987,97.94 v1(149.987,98.425) ; NRF.11 149.428,105.927 150.25,105.927 150.472,106.149 150.472,108.221 150.472,109.07 v1(150.749,109.347) ; v2(150.385,104.925) 150.422,104.962 150.422,105.349 150.483,105.41 150.483,106.149 150.483,108.221 150.495,108.233 ; 151.536,113.411 151.511,113.386 151.511,114.427 v1(151.892,114.808) 152.273,115.189 154.178,115.189 155.448,113.919 155.473,113.944
VCC_MPU: C5.2 C6.2 MPU1.8 MPU1.13 NRF.25 | length 21.3
  Top Layer w0.305: v2(150.829,103.712) 154.225,103.712 v2(154.363,103.574)
  Bottom Layer w0.305: NRF.25 149.202,105.179 150.192,104.189 150.305,104.189 150.783,103.712 v2(150.829,103.712) ; C5.2 150.495,102.257 150.495,103.378 v2(150.829,103.712) ; MPU1.13 151.162,104.045 v2(150.829,103.712) ; MPU1.8 153.912,104.025 v2(154.363,103.574) 154.813,103.124 C6.2 C6.2@154.94,102.362
Vchargement: "Alim. Q..2" C3.1 C4.1 D4.1 pad.5 R3.2 | length 22
  Top Layer w0.508: 136.906,87.757 136.906,87.744 139.929,84.722 v1(139.929,84.709) ; pad.5 145.288,84.074 v1(144.272,83.058) 144.321,83.009 144.321,82.247 v1(146.177,80.391)
  Bottom Layer w0.305: C4.1 C3.1@144.653,79.48
  Bottom Layer w0.508: v1(139.929,84.709) 140.564,84.074 141.478,84.074 141.859,83.693 142.324,83.693 D4.1 v1(144.272,83.058) ; C3.1@144.653,79.48 144.717,79.416 147.627,79.416 R3.2 ; C3.1 144.813,79.49 145.665,80.342 146.128,80.342 v1(146.177,80.391)
Vext: "Power Vext.1" "Régulateur de charge.4" C7.1 D2.2 D?.2 pad.6 Vext.2 | length 54
  Top Layer w0.305: v2(142.621,87.63) 148.975,87.63 152.531,84.074 pad.6 ; 150.622,88.785 150.722,88.785 151.982,90.045 153.521,90.045 v2(153.531,90.055)
  Bottom Layer w0.305: v2(142.621,87.63) 143.042,87.209 143.042,86.873 D?.2 ; pad.6 154.559,82.169 154.559,78.74 153.785,77.966 153.785,76.805 D2.2@153.18,76.2 ; D2.2 D2.2@153.18,76.2 ; v2(153.531,90.055) 153.531,91.347 C7.1@153.438,91.44 ; 153.613,93.665 153.613,91.635 C7.1 C7.1@153.438,91.44 ; D2.2@153.18,76.2 156.83,76.2 157.338,76.708 Vext.2 158.536,77.637 158.536,91.261 158.155,91.642 155.639,91.642 155.436,91.44 C7.1@153.438,91.44
pads on no net: "Off / On.4" "Off / On.5" "Régulateur de charge.1" LDO1.4 MPU1.2 MPU1.3 MPU1.4 MPU1.5 MPU1.6 MPU1.7 MPU1.9 MPU1.12 MPU1.14 MPU1.15 MPU1.16 MPU1.17 MPU1.19 MPU1.21 MPU1.22 NRF.7 NRF.8 NRF.9 NRF.10 NRF.13 NRF.14 NRF.16 NRF.17 NRF.18 NRF.20 NRF.22 NRF.23 NRF.28 NRF.29 NRF.30 NRF.32 NRF.33 NRF.34 NRF.38 NRF.40 NRF.41
copper on no net:
  other v3: 137.16,117.475 157.099,117.475

## Polygon pours and split planes (outlines as drawn)
GND on Bottom Layer "BTM_GND" (solid, remove dead copper, pour order 0): 134.62,119.634 134.62,74.549 159.639,74.549 159.639,119.634
GND on Top Layer "TOP_GND" (solid, remove dead copper, pour order 1): 134.62,119.634 134.62,74.549 159.639,74.549 159.639,119.634

## Keep-outs
Keep-Out Layer:
  the board outline again, w0.254

## Other copper
Top Layer:
  pour cut-out: 140.335,115.824 140.335,112.395 149.352,112.395 149.352,115.824
  pour cut-out: 134.62,119.634 159.639,119.634 159.639,115.824 134.62,115.824
Bottom Layer:
  pour cut-out: 140.335,115.824 140.335,112.395 149.352,112.395 149.352,115.824
  pour cut-out: 156.718,86.138 156.559,85.979 155.194,85.979 155.194,85.662 156.845,84.011 156.845,81.788 158.496,81.788 158.623,81.915 158.623,86.868 156.972,86.868 156.845,86.741
  pour cut-out: 156.897,91.642 158.155,91.642 158.536,91.261 158.496,91.221 158.496,87.249 156.845,87.249 156.718,87.376
  pour cut-out: 146.939,101.473 146.431,100.965 146.431,98.425 146.05,98.425 145.415,97.79 143.51,99.695 143.51,102.489 144.272,103.251 144.495,103.028 146.88,103.028
  pour cut-out: 150.114,111.252 150.241,111.125 154.305,111.125 154.305,110.363 152.019,108.077 150.622,108.077 150.622,108.839 150.114,109.347
  pour cut-out: 148.463,87.63 149.86,86.233 156.845,86.233 156.972,86.36 156.718,86.614 156.718,88.138 148.717,88.138
  pour cut-out: 134.62,119.634 134.62,115.824 159.639,115.824 159.639,119.634

## Silkscreen, mask and mechanical layers (free items; w line width, h text height)
Top Overlay:
  lines w0.254: 141.986,100.711 144.78,100.711 ; 148.526,98.933 148.018,99.441 ; 148.526,99.949 148.018,99.441 ; 149.733,88.138 149.733,90.932 ; 149.733,100.965 150.241,101.473 150.749,100.965 ; 150.177,99.441 148.018,99.441 ; 150.241,99.441 150.241,101.219
  text "SWDIO" at 138.176,113.284 h1
  text "SDA" at 146.558,111.76 h1
  text "SWDCLK" at 138.303,110.744 h1
  text "SCL" at 146.685,109.22 h1
  text "RST" at 138.43,108.204 h1
  text "TX" at 146.685,106.68 h1
  text "VCC" at 138.43,105.664 h1
  text "RX" at 146.685,104.14 h1
  text "GND" at 138.303,103.251 h1
  text "y" at 149.86,102.568 h1
  text "VCC" at 146.685,101.473 h1
  text "GND" at 146.685,99.06 h1
  text "x" at 146.812,99.06 h1
  text "bat" at 147.1,80.738 h1 r60
  text "ext" at 151.291,80.738 h1 r60
  text "bext" at 148.751,79.849 h1 r60
  text "charg" at 144.017,78.746 h1 r60
Bottom Overlay:
  lines w0.254: 142.232,111.123 ccw(c142.621,114.109) 145.288,112.712 ; 142.24,105.71 ccw(c143.764,107.632) 145.296,105.716 ; 142.24,105.727 142.24,111.123 ; 142.24,111.188 cw(c144.653,110.172) 145.288,112.712 ; 143.383,99.06 143.383,102.235 ; 145.288,105.727 145.288,112.712
  text "JLCJLCJLCJLC" at 150.749,117.348 h1
  text "A.C. G.G. J.J. M.LR R.M. <3" at 134.874,89.281 h1 r270
  text "2022-23/ESEO/Molkky connecte/V2" at 158.194,83.566 h1 r270
Mechanical 13:
  rectangle: 128.651,70.523 158.651,120.523